# Altium PCB XL1507.PcbDoc
Units mil, origin at the board's own origin, x right, y up, seen from the top; angles counter-clockwise.
Board outline 2165.35 x 1335 mil, 2 copper layers (Top Layer, Bottom Layer); 10 components, 4 nets, 24 pads, 7 vias.
Unrouted connection lines stored in the file: 5.
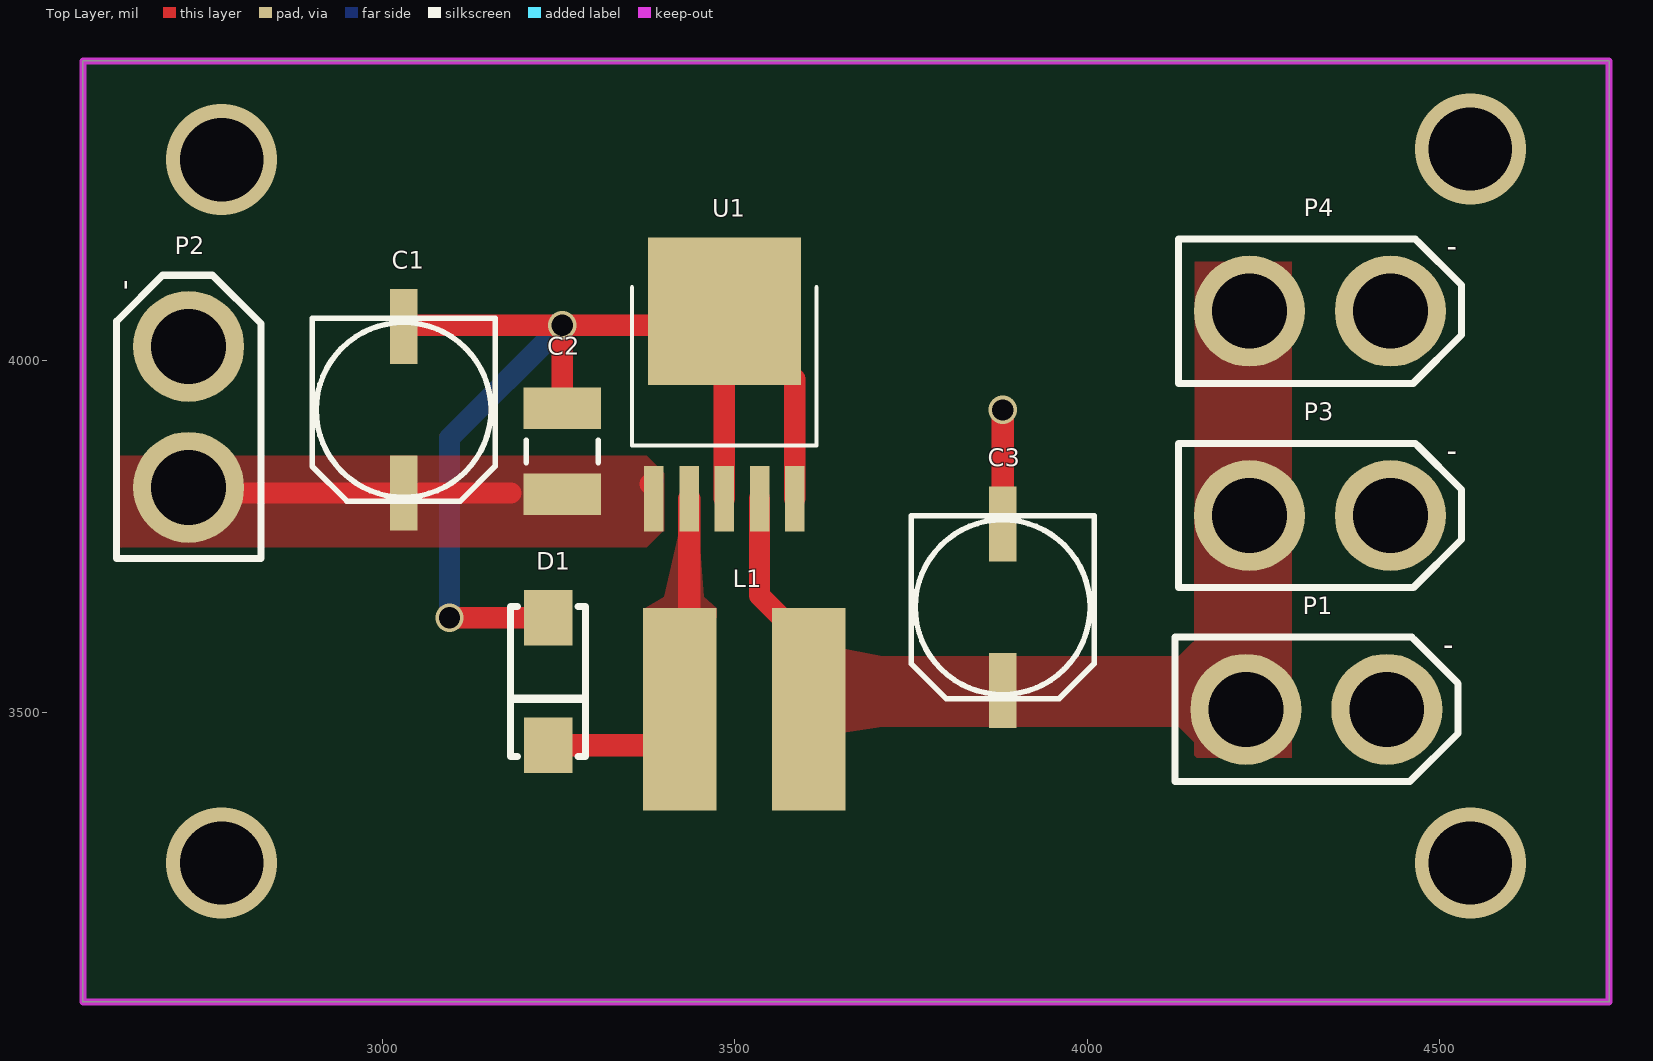
[diagram p0: Top Layer view]
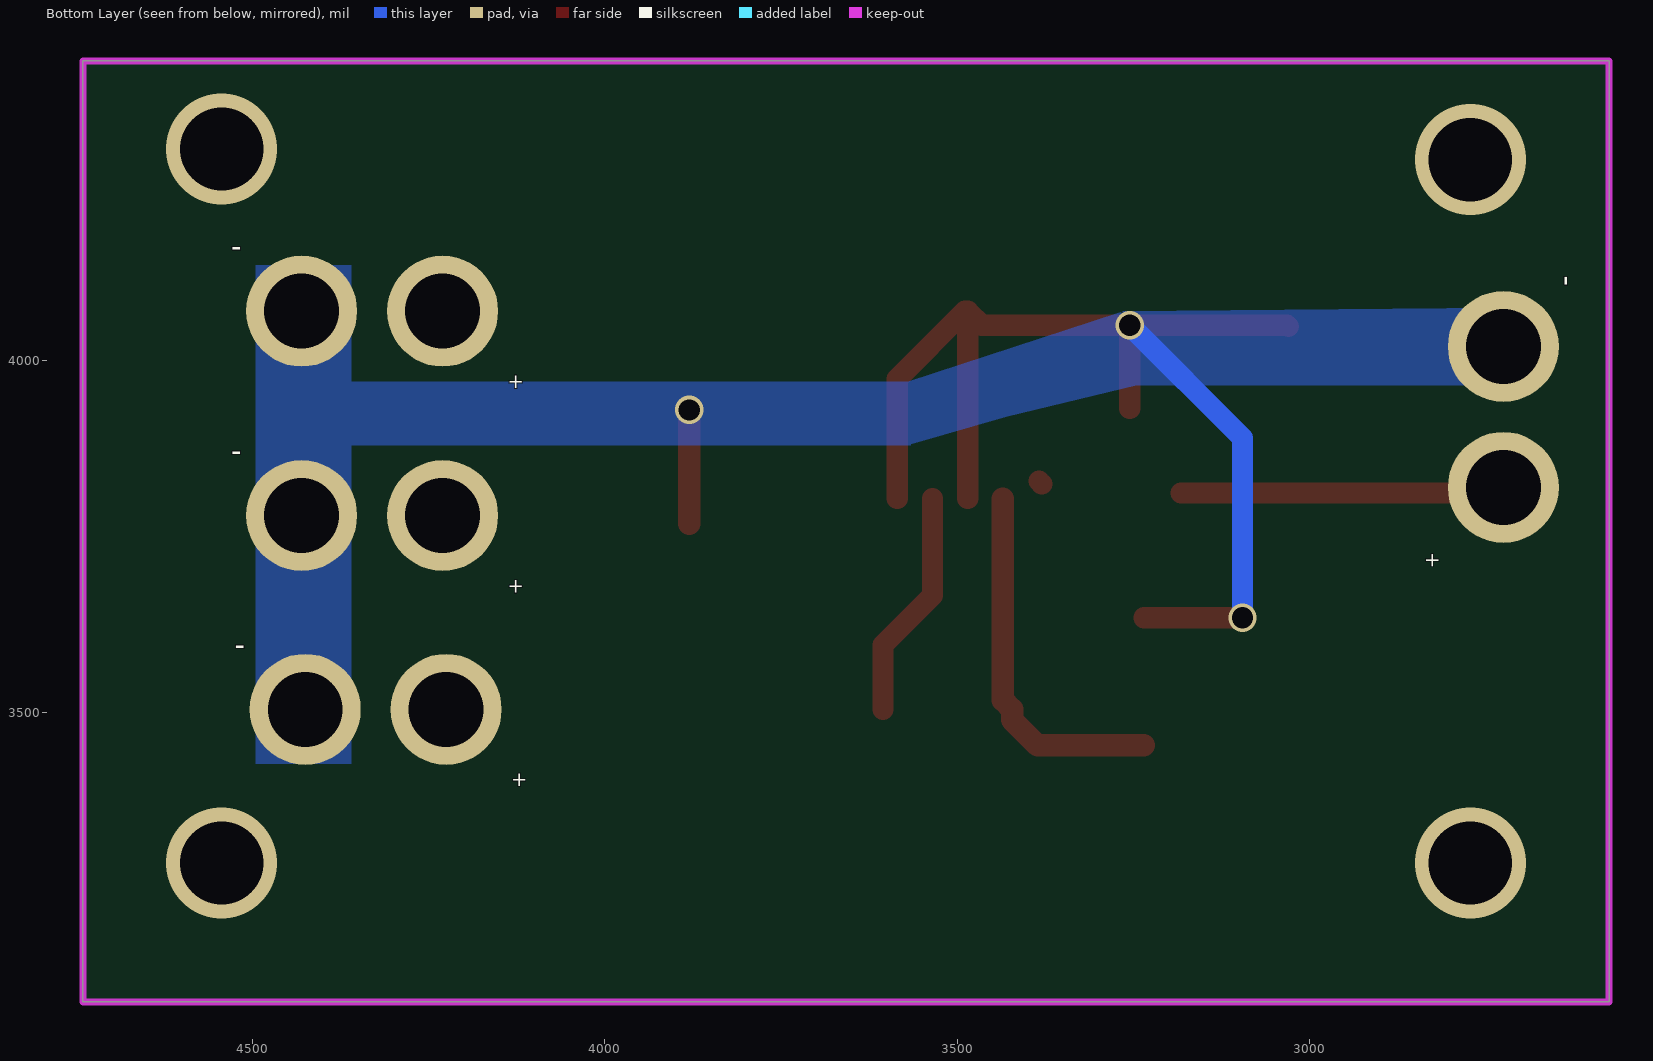
[diagram p1: Bottom Layer view, seen from below]
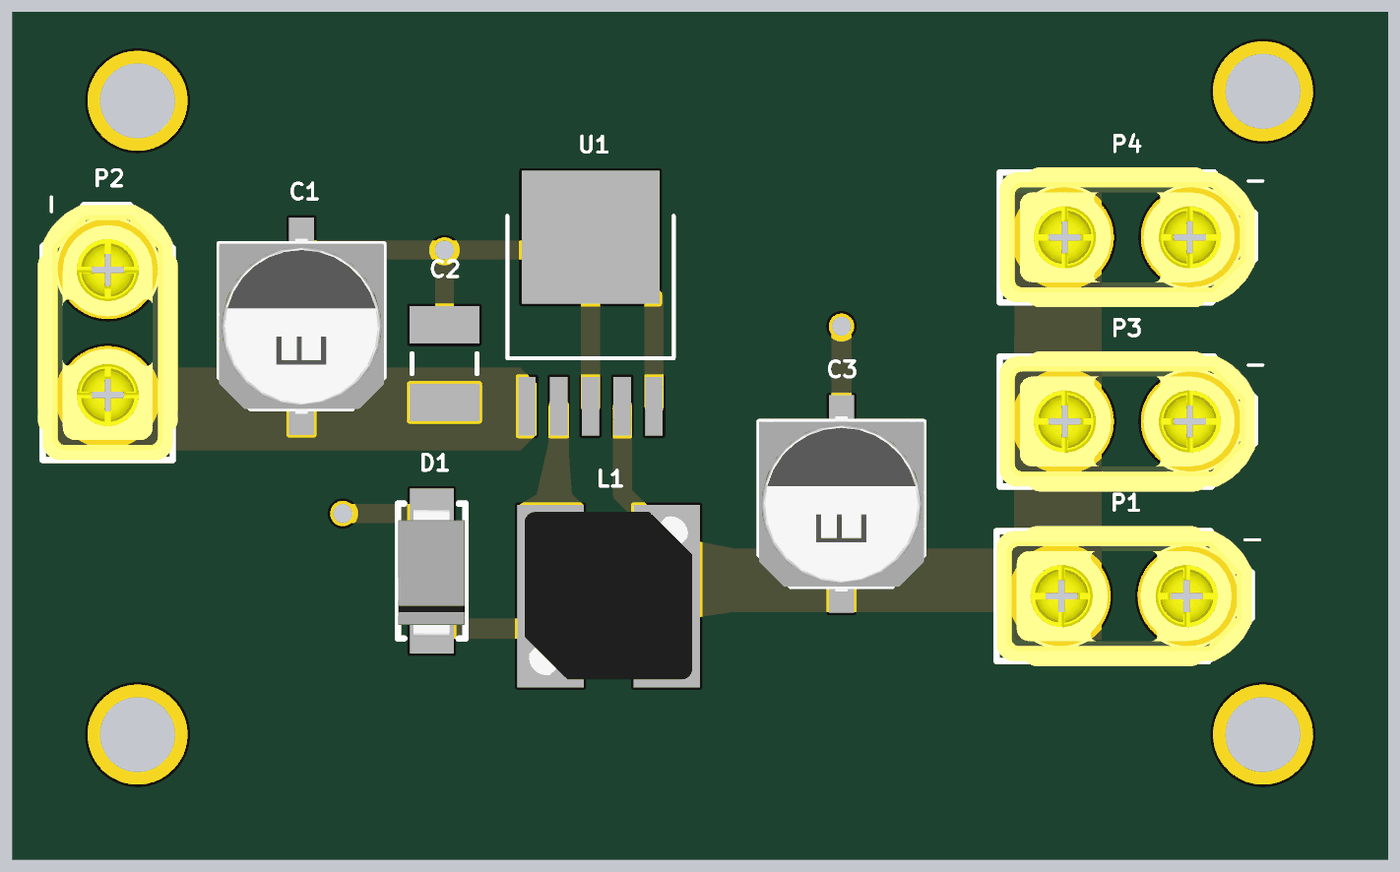
[diagram p2: 3D render of the assembled board from above, using the file's embedded part models]

## Layer stack, top to bottom
Top Solder: solder mask 0.4, Solder Resist, Dk 3.5
Top Layer: signal copper 1.4
Dielectric 1: dielectric 12.6, FR-4, Dk 4.8
Bottom Layer: signal copper 1.4
Bottom Solder: solder mask 0.4, Solder Resist, Dk 3.5

## Board outline
2575,3090 4740.35,3090 4740.35,4425 2575,4425

## Design rules (kind name [scope] priority, off if disabled: settings)
Clearance [All] p1: gap=10 ignorepadtopadclearanceinfootprint=FALSE except(0: Arc-Hole Track-Hole SMDPad-Hole THPad-Hole Via-Hole Fill-Hole Poly-Hole Region-Hole Text-Hole)
PolygonConnect [All] p1: connectstyle=Direct reliefconductorwidth=10 reliefentries=4 polygonreliefangle="90 Angle" airgapwidth=10
RoutingVias [All] p1: holewidth=20 width=30 viastyle="Through Hole" minholewidth=10 minwidth=20 maxholewidth=196.85 maxwidth=196.85
SolderMaskExpansion [All] p1: expansion=4 istentingtop=FALSE
UnpouredPolygon [All] p1: allowunpoured=TRUE allowshelved=TRUE
Width [All] p1: maxlimit=200 minlimit=10 preferedwidth=15 minimp=50.000000 maximp=50.000000 favimp=50.000000
29 further rules are at their usual default settings.

## Components (designator, comment, footprint, x,y, rotation, side; value= is the part's Value field where it differs from the comment)
C1 "470uF 35V" C6.3X6.3 3030,3930 r90 top value=337
C2 "105" C1210_M 3255,3871.02 r270 top
C3 "330uF 35V" C6.3X6.3 3880,3650 r90 top value=337
D1 "20V" DO-214 3235,3635 r270 top
L1 "33uH/3A" L7X7 3513.46,3505 r0 top value=47uH
P1 "STM32F103" XT30-M 4325,3505 r0 top
P2 "BAT" XT30-M 2725,3920 r90 top
P3 "JGB37-520" XT30-M 4330,3780 r0 top
P4 "TD-8120" XT30-M 4330,4070 r0 top
U1 "XL1507-5.0E1" TO252-5 3485,3936.98 r90 top

## Footprints (in the part's own frame and the unit in brackets; to place one, negate y for a bottom-side part, rotate by r counter-clockwise, add the part's x,y. Pads: shape width x height; smd on the part's side, far side on the other; paste and mask are expansions set on the pad)
C6.3X6.3 [mm]
  rect 2.7x1 smd: 1(-3,0) 2(3,0)
  silkscreen extent -3.3,-3.3 3.3,3.3, body extent -3.5,-3.3 3.5,3.3, height 5.2
C1210_M [mm] "Chip Capacitor, Body 3.2x2.5mm, IPC Low Density"
  rect 1.5x2.8 smd: 1(-1.55,0) 2(1.55,0)
  silkscreen extent -0.4,-1.3 0.4,1.3, body extent -1.7,-1.35 1.7,1.35, height 1.5
DO-214 [mm]
  rect 2x1.75 smd: 1(0,0) 2(4.6,0)
  silkscreen extent -0.4,-1.35 5,1.35, body extent -0.2,-1.34 4.91,1.33, height 2.12
L7X7 [mm] "POWER INDUCTOR 5uH"
  rect 2.65x7.3 smd: 1(-2.325,0) 2(2.325,0)
  body extent -3.36,-3.33 3.34,3.37, height 2.9
TO252-5 [mm]
  rect 2.357x0.7 smd: 1(-3.379,2.54) 2(-3.379,1.27) 3(-3.379,0) 4(-3.379,-1.27) 5(-3.379,-2.54)
  rect 5.324x5.512 smd: 6(3.379,0)
  silkscreen extent -1.46,-3.33 4.24,3.33
XT30-M [mm]
  round 4 hole 2.7: 1(-2.54,0) 2(2.54,0)
  silkscreen extent -5.1,-2.6 5.11,2.6, body extent -5.1,-2.8 5.1,2.8, height 10.66

## Part data
C1: library part CAP2, "EMZS350ARA471MHA0G", PackageDescription="Capacitor; 2 Leads", PackageReference=CAPR5-4X5, Published=23-Sep-2002, Publisher="Altium Limited"
C2: library part C, "CL32B105KBHNNNE", BOM名称=无极性贴片电容, 封装库来自淘宝卖家ID：黄晶宝石=其他店铺购入均为盗版假冒封装库，请立即申请退款, 联系卖家，免费查找封装=唯一出售店铺网址https://shop463601444.taobao.com
C3: library part CAP2, "UCM1V331MNL1GS", PackageDescription="Capacitor; 2 Leads", PackageReference=CAPR5-4X5, Published=23-Sep-2002, Publisher="Altium Limited"
D1: library part 1N5820RLG, "SS12-E3/61T"
L1: library part Inductor, "FAUL0650-330MT", Code_IEC=1005, Code_JEITA=0402, LatestRevisionDate=29-May-2009, LatestRevisionNote="IPC-7351 Footprint Added.", PackageDescription="Chip Inductor", PackageReference=0402-A, Published=8-Jun-2000, Publisher="Altium Limited"
P1 P2 P3 P4: library part "Header 2", "Header, 2-Pin", LatestRevisionDate=17-Jul-2002, LatestRevisionNote="Re-released for DXP Platform.", Publisher="Altium Limited"
U1: library part LM2596S-5.0, "12V-5V", Manufacturer="National Semiconductor", PackageTopMarking="NSUZXYTTE#*LM2596S*-5.0 P+", PowerWise=N, Code_JEDEC=MO-169-AB, ComponentLink1Description="Manufacturer URL", ComponentLink1URL=http://www.national.com/, ComponentLink2Description="LM2596 Datasheet", ComponentLink2URL=http://www.national.com/ds/LM/LM2596.pdf, ComponentLink3Description="LM2596 Web Page", ComponentLink3URL=http://www.national.com/pf/LM/LM2596.html, ComponentLink4Description="TS5B Package Page", ComponentLink4URL=http://www.national.com/packaging/folders/ts5b.html, CompType=Switcher, DatasheetVersion=May-2002, High-Reliability=Y, PackageDescription="TO-263, Molded, .400 x .390 x .180in, 5 Lead, .067in Pitch, Surface Mount", PackageReference=TS5B, PackageVersion="revD, Apr-2005", PartNumber=LM2596S-5.0, PinCount=5, RoHS=N

## Via types
v1: diameter 157.48, hole 118.11, Top Layer to Bottom Layer, 4 vias
v2: diameter 40, hole 30, Top Layer to Bottom Layer, 3 vias

## Nets (pads, with @x,y where several pads share a name; then routed paths per layer and width w, separated by ;. In a path a pad name is that pad's centre, name@x,y a point inside that pad or via, vN(x,y) a via of type N, cw(c..) or ccw(c..) an arc to the next point about the centre after c; other vN are vias at no path point)
+5: C3.1 L1.2 P1.1 P3.1 P4.1 U1.4 | length 349.2
  Top Layer w30: U1.4 3535,3666.54 3605,3596.54 L1.2
  Top Layer w40: P3.1 P3.1@4245,3795
+12: C1.1 C2.2 P2.1 U1.1 | length 469.6
  Top Layer w30: P2.1@2722.5,3817.5 P2.1 2733.11,3811.89 C1.1 3182.32,3811.89 ; U1.1@3380,3825 U1.1@3383.78,3828.78
GND: C1.2 C2.1 C3.2 D1.1 P1.2 P2.2 P3.2 P4.2 U1.3 U1.5 U1.6 | length 1972.2
  Top Layer w30: C1.2 3031.89,4050 v2(3255,4050) ; v2(3095,3635) D1.1 ; C2.1 v2(3255,4050) ; U1.3 U1.6 ; U1.5 3585,3973.7 3488.7,4070 U1.6 ; v2(3255,4050) 3465,4050 U1.6
  Top Layer w32: C3.2 v2(3880,3930)
  Bottom Layer w30: v2(3095,3635) 3095,3890 v2(3255,4050)
  Bottom Layer w35: P4.2 P4.2@4452.13,4092.13
NetD1_2: D1.2 L1.1 U1.2 | length 521.2
  Top Layer w32: D1.2 3385.76,3453.9 3421.93,3490.06 L1.1 3435,3518.07 U1.2
copper on no net:
  other v1: 2771.85,3286.85 4543.5,3286.85 2771.85,4285 4543.5,4300

## Polygon pours and split planes (outlines as drawn)
+5 on Top Layer "+5_L01_P003" (solid, remove dead copper, pour order 3): 4152.31,4140 4290,4140 4290,3433.64 4290,3436.63 4268.37,3436.63 4151.6,3436.63
NetD1_2 on Top Layer "NETD1_2_L01_P006" (solid, remove dead copper, pour order 6): 3474.09,3648.7 3472,3648.7 3474.09,3648.7 3474.09,3635 3370,3635 3370,3646.93 3400,3665 3421.22,3757.56 3448.78,3757.56 3455.7,3665
+5 on Top Layer "+5_L01_P005" (solid, remove dead copper, pour order 5): 3710,3480 3639.38,3469.38 3627.81,3442.5 3628.75,3480 3631.25,3580 3631.54,3591.54 3632.19,3617.5 3635,3595 3710,3580 4130,3580 4171.67,3621.67 4180,3617.5 4180,3455 4167.5,3442.5 4130,3480
+12 on Top Layer "+12_L01_P002" (solid, remove dead copper, pour order 2): 3400,3865 2625,3865 2625,3730 2630,3735 3400,3735
GND on Bottom Layer "GND_L02_P013" (solid, remove dead copper, pour order 13): 3265,4070 3570,3970 3570,3880 3430,3920 3245,3965
GND on Bottom Layer "GND_L02_P012" (solid, remove dead copper, pour order 12): 3555,3970 4385,3970 4385,3880 3566.01,3880
GND on Bottom Layer "GND_L02_P011" (solid, remove dead copper, pour order 11): 2725,4075 3265,4070 3275,3965 2725,3965
GND on Bottom Layer "GND_L02_P010" (solid, remove dead copper, pour order 10): 4360,4135 4495,4135 4495,3427.64 4360,3427.64

## Keep-outs
Keep-Out Layer:
  the board outline again, w10

## Other copper
Top Layer:
  pour cut-out: 3370,3870 3405,3835 3405,3870
  pour cut-out: 3370,3730 3397.56,3757.56 3405,3757.56 3405,3730

## Text inside footprints (layer, text, board x,y; h text height)
P1: Top Overlay "-" at 4505,3582 h30; Bottom Overlay "-" at 4525,3582 h30; Bottom Overlay "+" at 4132.89,3395.76 h20
P2: Top Overlay "-" at 2648,4100 h30 r90; Bottom Overlay "-" at 2648,4120 h30 r90; Bottom Overlay "+" at 2834.24,3727.89 h20 r90
P3: Top Overlay "-" at 4510,3857 h30; Bottom Overlay "+" at 4137.89,3670.76 h20; Bottom Overlay "-" at 4530,3857 h30
P4: Top Overlay "-" at 4510,4147 h30; Bottom Overlay "+" at 4137.89,3960.76 h20; Bottom Overlay "-" at 4530,4147 h30